# Altium PCB PCB1.PcbDoc
Units mm, origin at the board's own origin, x right, y up, seen from the top; angles counter-clockwise.
Board outline 94.87 x 57.28 mm, 4 copper layers (Top Layer, Int1 (GND), Int2 (PWR), Bottom Layer), stack 1.369 mm thick; 62 components, 43 nets, 200 pads, 42 vias.
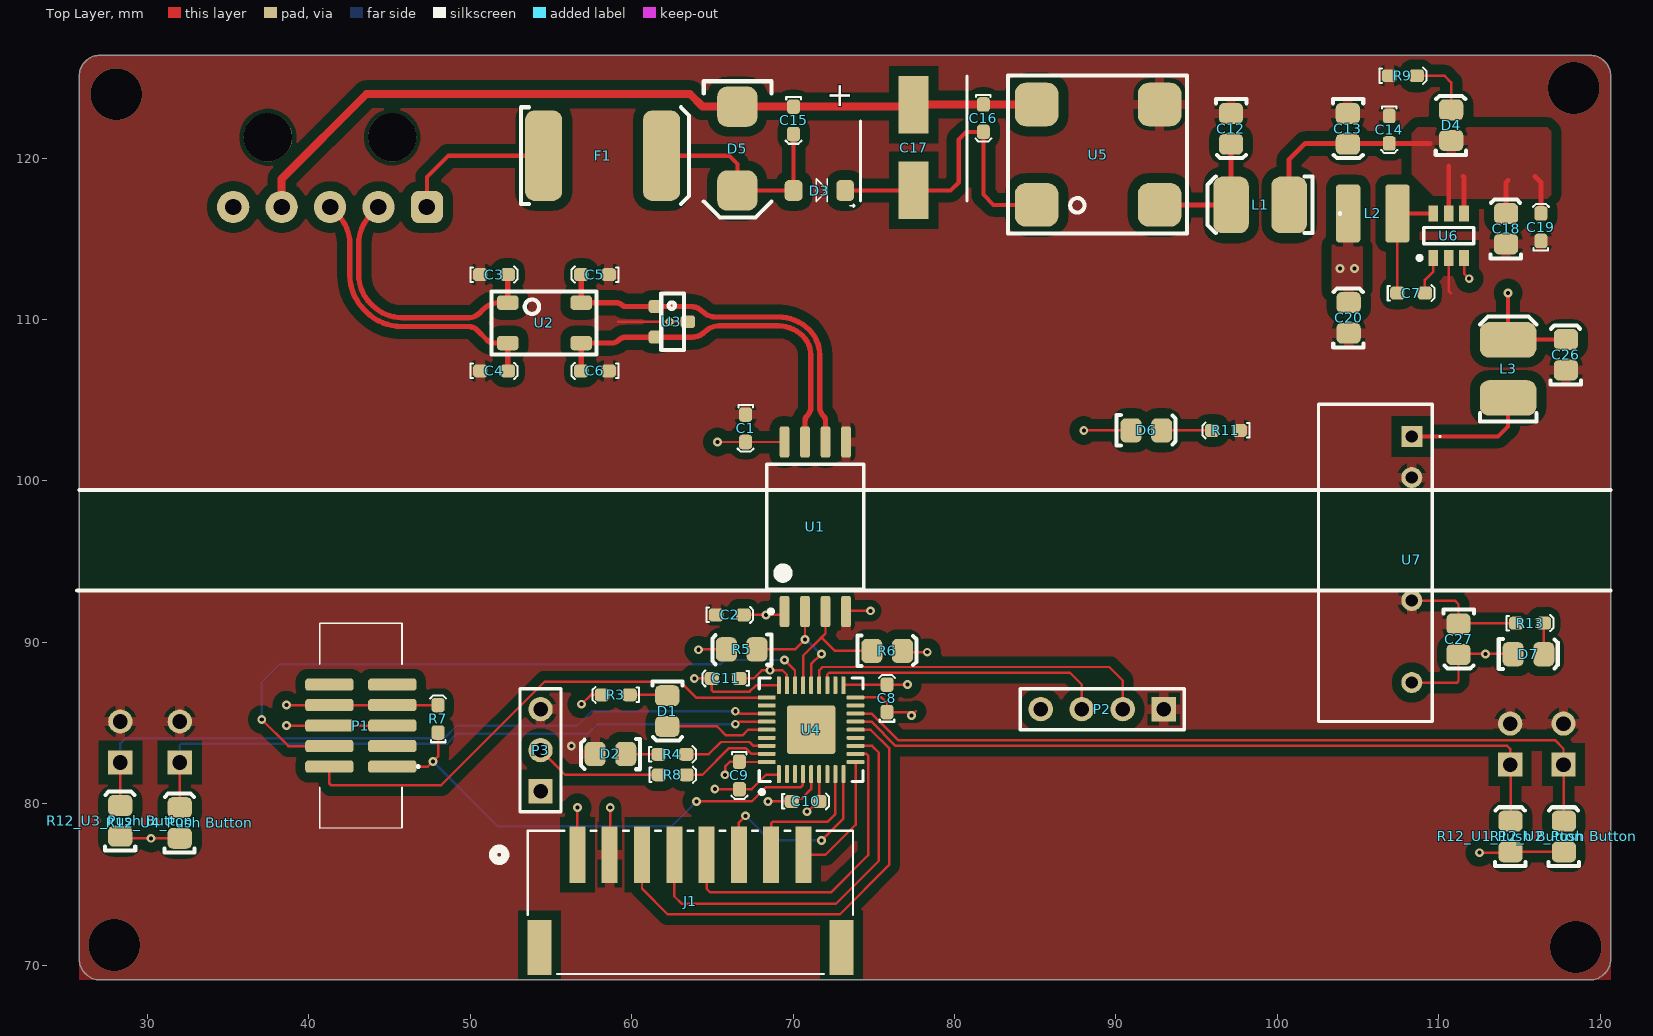
[diagram p0: Top Layer view]
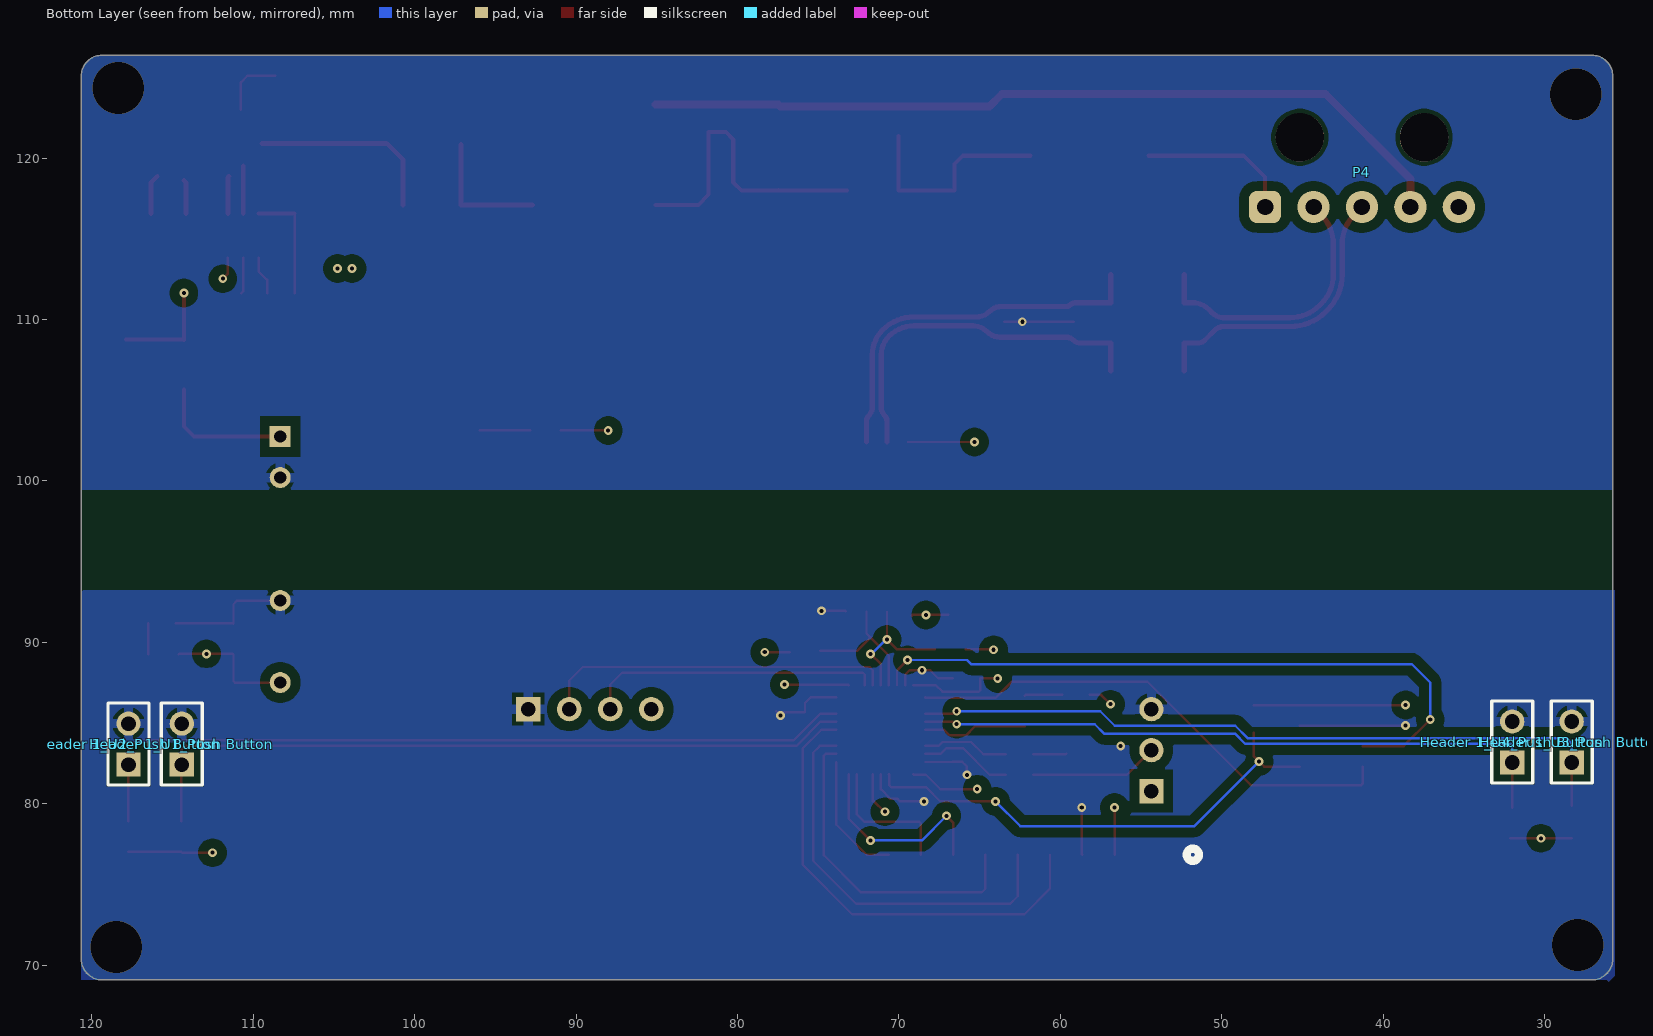
[diagram p1: Bottom Layer view, seen from below]
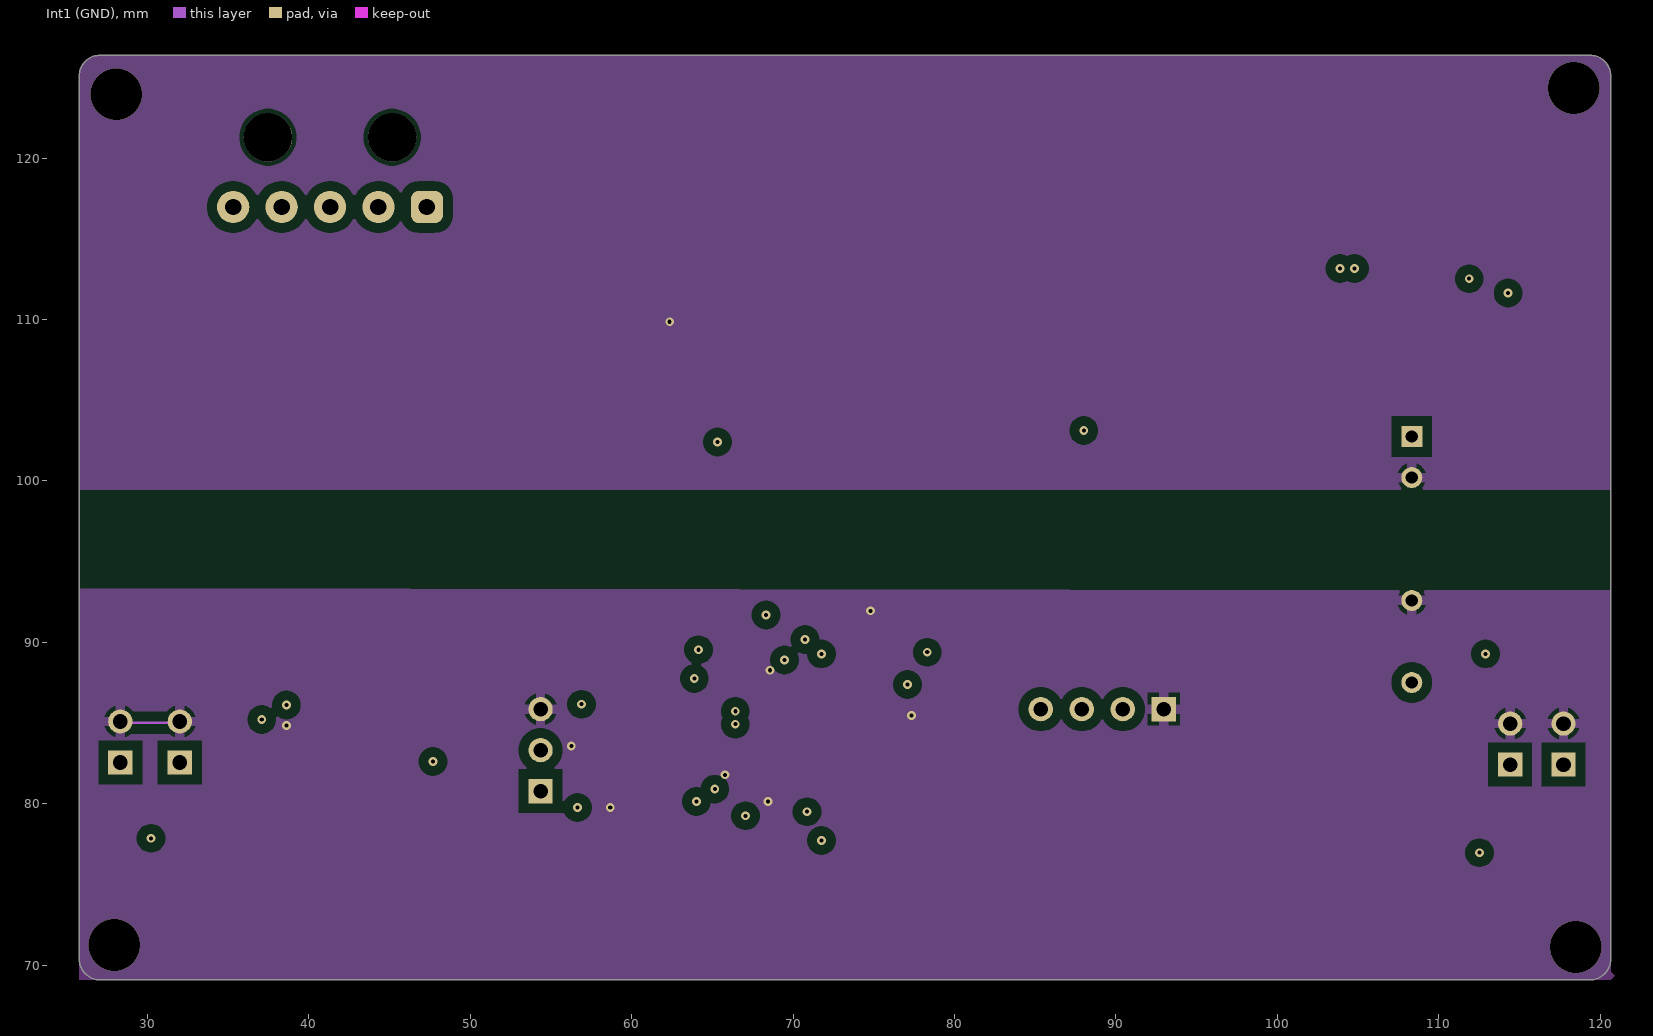
[diagram p2: Int1 (GND)]
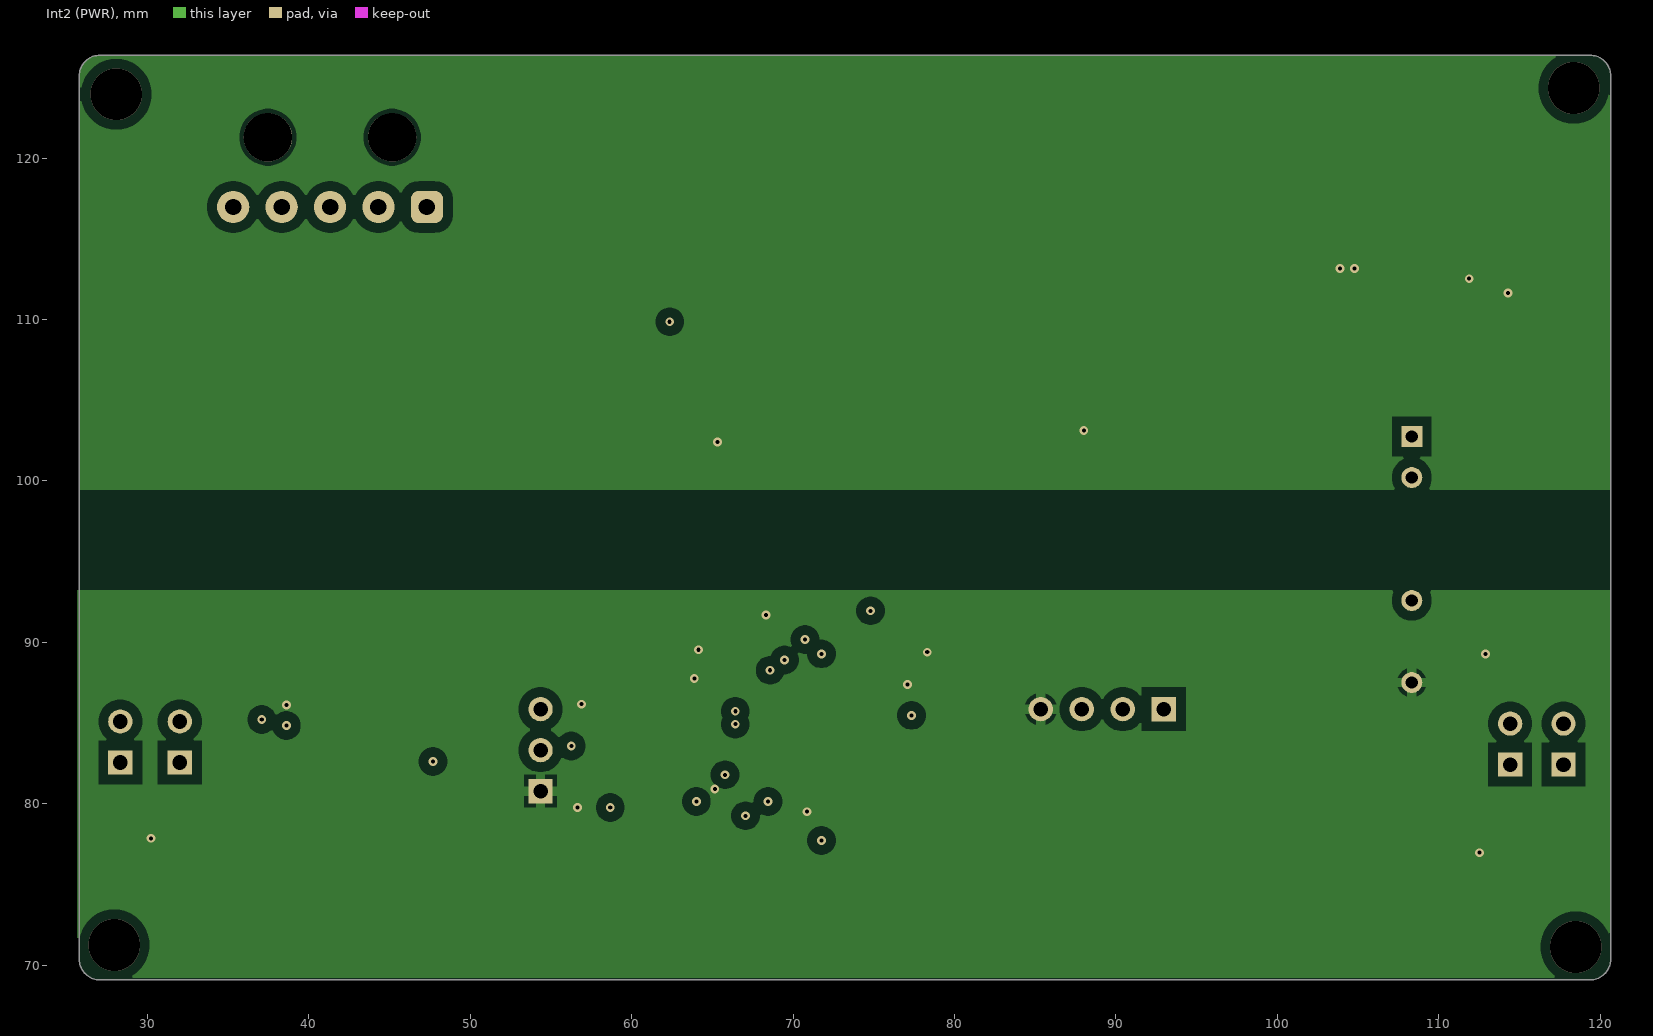
[diagram p3: Int2 (PWR)]
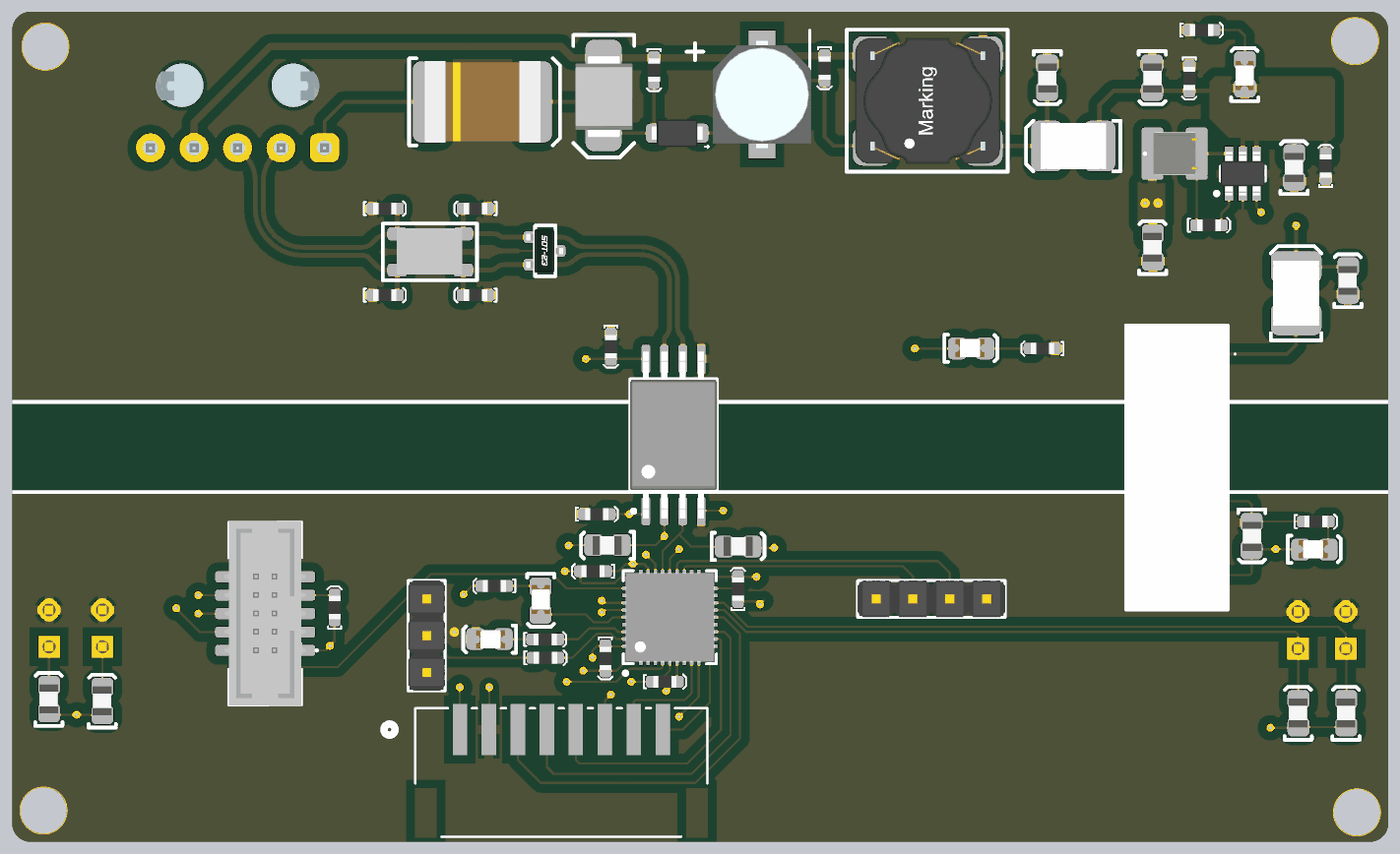
[diagram p4: 3D render of the assembled board from above, using the file's embedded part models]
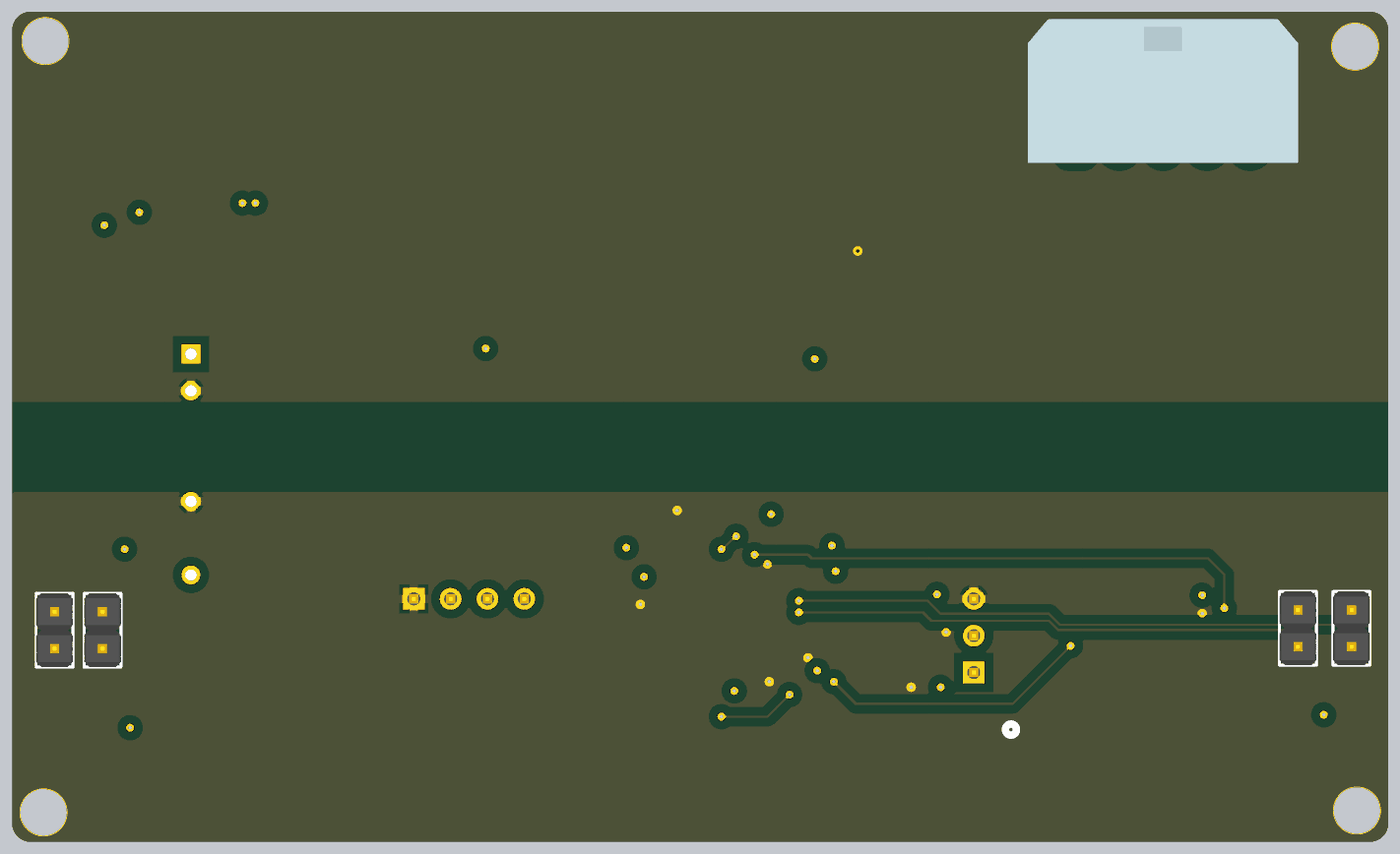
[diagram p5: 3D render of the assembled board from below, using the file's embedded part models]

## Layer stack, top to bottom
Top Solder: solder mask 0.0254, SM-001, Dk 4
Top Layer: signal copper 0.035
Dielectric 1: prepreg 0.1295, PP-017, Dk 4.3
Dielectric 2: prepreg 0.1295, PP-017, Dk 4.3
Int1 (GND): signal copper 0.035
Dielectric 3: core 0.7112, Core-039, Dk 4.8
Int2 (PWR): signal copper 0.035
Dielectric 4: prepreg 0.1295, PP-017, Dk 4.3
Dielectric 5: prepreg 0.1295, PP-017, Dk 4.3
Bottom Layer: signal copper 0.035
Bottom Solder: solder mask 0.0254, SM-001, Dk 4

## Board outline
27.051,69.088 cw(c27.051,70.358) 25.781,70.358 25.781,125.095 cw(c27.051,125.095) 27.051,126.365 119.38,126.365 cw(c119.38,125.095) 120.65,125.095 120.65,70.358 cw(c119.38,70.358) 119.38,69.088

## Design rules (kind name [scope] priority, off if disabled: settings)
Clearance Clearance_1 [(ExistsOnLayer('Int1 (GND)') Or ExistsOnLayer('Int2 (PWR)')) vs (ExistsOnLayer('Int1 (GND)') Or ExistsOnLayer('Int2 (PWR)'))] p1: gap=0.254 ignorepadtopadclearanceinfootprint=FALSE except(0: Arc-Hole Track-Hole SMDPad-Hole THPad-Hole Via-Hole Fill-Hole Region-Hole Text-Hole; 0.1: THPad-THPad; 0.152: Arc-SMDPad Track-SMDPad SMDPad-SMDPad; 0.2: Arc-THPad Track-THPad SMDPad-THPad THPad-Via; 0.203: Arc-Arc Arc-Track Arc-Region Track-Track Track-Region SMDPad-Region THPad-Region Via-Region Fill-Region Poly-Region Region-Region; 0.6: Arc-Poly Track-Poly SMDPad-Poly THPad-Poly Via-Poly Fill-Poly Poly-Poly) sourcerule=36 cellrowname=All cellrowtype=0 cellcolname=All cellcoltype=0 innerlayers=TRUE
Clearance Clearance_2 [(ExistsOnLayer('Top Layer') Or ExistsOnLayer('Bottom Layer')) vs (ExistsOnLayer('Top Layer') Or ExistsOnLayer('Bottom Layer'))] p2: gap=0.254 ignorepadtopadclearanceinfootprint=FALSE except(0: Arc-Hole Track-Hole SMDPad-Hole THPad-Hole Via-Hole Fill-Hole Region-Hole Text-Hole; 0.1: THPad-THPad; 0.152: Arc-SMDPad Track-SMDPad SMDPad-SMDPad; 0.2: Arc-THPad Track-THPad SMDPad-THPad THPad-Via; 0.203: Arc-Arc Arc-Track Arc-Region Track-Track Track-Region SMDPad-Region THPad-Region Via-Region Fill-Region Poly-Region Region-Region; 0.6: Arc-Poly Track-Poly SMDPad-Poly THPad-Poly Via-Poly Fill-Poly Poly-Poly) sourcerule=36 cellrowname=All cellrowtype=0 cellcolname=All cellcoltype=0 outerlayers=TRUE
Clearance [All] p3: gap=0.254 ignorepadtopadclearanceinfootprint=FALSE except(0: Arc-Hole Track-Hole SMDPad-Hole THPad-Hole Via-Hole Fill-Hole Region-Hole Text-Hole; 0.1: THPad-THPad; 0.152: Arc-SMDPad Track-SMDPad SMDPad-SMDPad; 0.2: Arc-THPad Track-THPad SMDPad-THPad THPad-Via; 0.203: Arc-Arc Arc-Track Arc-Region Track-Track Track-Region SMDPad-Region THPad-Region Via-Region Fill-Region Poly-Region Region-Region; 0.6: Arc-Poly Track-Poly SMDPad-Poly THPad-Poly Via-Poly Fill-Poly Poly-Poly) ismatrix=TRUE
DiffPairsRouting [All] p1: maxlimit=0.22 minlimit=0.22 mostfreqgap=0.22 toplayer_minwidth=0.33 toplayer_maxwidth=0.33 toplayer_prefwidth=0.33 midlayer1_minwidth=0.33 midlayer1_maxwidth=0.33 midlayer1_prefwidth=0.33 midlayer2_minwidth=0.33 midlayer2_maxwidth=0.33 midlayer2_prefwidth=0.33 bottomlayer_minwidth=0.33 bottomlayer_maxwidth=0.33 bottomlayer_prefwidth=0.33 maxuncoupledlength=12.7
Height [All] p1: minheight=0 maxheight=50 prefheight=12.7
HoleSize [All] p1: absolutevalues=TRUE maxlimit=10 minlimit=0.025 maxpercent=80.000 minpercent=20.000
MinimumSolderMaskSliver [All] p1 off: minsoldermaskwidth=0.254
NetAntennae [All] p1 off: netantennaetolerance=0
PlaneClearance [All] p1: clearance=0.4
PlaneConnect [All] p1: pad.planeconnectstyle=Relief pad.reliefexpansion=0.508 pad.reliefentries=4 pad.reliefconductorwidth=0.8 pad.reliefairgap=0.254 via.planeconnectstyle=Direct via.reliefexpansion=0.508 via.reliefentries=4 via.reliefconductorwidth=0.8 via.reliefairgap=0.254
PolygonConnect [All] p1: thpad.connectstyle=Relief thpad.reliefconductorwidth=0.6 thpad.reliefentries=4 thpad.polygonreliefangle="90 Angle" thpad.airgapwidth=0.254 smdpad.connectstyle=Relief smdpad.reliefconductorwidth=0.6 smdpad.reliefentries=4 smdpad.polygonreliefangle="90 Angle" smdpad.airgapwidth=0.254 via.connectstyle=Direct via.reliefconductorwidth=0.6 via.reliefentries=4 via.polygonreliefangle="90 Angle" via.airgapwidth=0.254
RoutingVias [All] p1: holewidth=0.25 width=0.55 viastyle="Through Hole" minholewidth=0.203 minwidth=0.254 maxholewidth=0.711 maxwidth=1.27
SilkToSilkClearance [All] p1 off: silktosilkclearance=0.254
SilkToSolderMaskClearance [IsPad] p1 off: minsilkscreentomaskgap=0.254 clearancetoexposedcopper=TRUE
SolderMaskExpansion [All] p1: expansion=0.051 istentingtop=FALSE
Width [All] p1: maxlimit=3 minlimit=0.127 preferedwidth=0.152 minimp=50.000000 maximp=50.000000 favimp=50.000000
21 further rules are at their usual default settings.

## Classes and differential pairs
component class TopLevel: P4
channel class "Push Button": "U1_Push Button" "U2_Push Button" "U3_Push Button" "U4_Push Button"
component class U_Microcontroller: C8 C9 C10 C11 D1 D2 P1 P2 P3 R3 R4 R5 R6 R7 R8 U4
component class "U_Driver Board Port": J1
component class "U4_Push Button": "Header 1_U4_Push Button" "R12_U4_Push Button" "S1_U4_Push Button"
component class "U3_Push Button": "Header 1_U3_Push Button" "R12_U3_Push Button" "S1_U3_Push Button"
component class "U2_Push Button": "Header 1_U2_Push Button" "R12_U2_Push Button" "S1_U2_Push Button"
component class "U1_Push Button": "Header 1_U1_Push Button" "R12_U1_Push Button" "S1_U1_Push Button"
component class "Power Supply": C7 C12 C13 C14 C15 C16 C17 C18 C19 C20 C26 C27 D3 D4 D5 D6 D7 F1 L1 L2 L3 R9 R11 R13 U5 U6 U7
component class CAN: C1 C2 C3 C4 C5 C6 U1 U2 U3
differential pair D_CAN1: +CAN1_P -CAN1_N
differential pair D_CAN: +CAN_P -CAN_N

## Components (designator, comment, footprint, x,y, rotation, side; value= is the part's Value field where it differs from the comment)
C1 "100nF" 0603 67.056,104.105 r270 top
C2 "100nF" 0603 65.229,91.694 r0 top
C3 "100pF" 0603 50.624,112.776 r0 top
C4 "100pF" 0603 50.624,106.807 r0 top
C5 "100pF" 0603 58.574,112.776 r180 top
C6 "100pF" 0603 58.574,106.807 r180 top
C7 "100nF" 0603 107.442,111.633 r0 top
C8 "100nF" 0603 75.819,85.676 r90 top
C9 "100nF" 0603 66.675,82.599 r270 top
C10 "100nF" 0603 69.928,80.137 r0 top
C11 "100nF" 0603 66.675,87.757 r180 top
C12 "10uF" 0805 97.155,121.793 r270 top
C13 "10uF" 0805 104.394,121.793 r270 top
C14 "100nF" 0603 106.934,122.604 r270 top
C15 "100nF" 0603 70.028,123.183 r270 top
C16 "100nF" 0603 81.788,123.317 r270 top
C17 "47uF" "CHEMI-CON ELCO" 77.47,120.65 r270 top
C18 "2.2uF" 0805 114.147,115.626 r90 top
C19 "100nF" 0603 116.332,114.864 r90 top
C20 "10uF" 0805 104.394,110.109 r90 top
C26 "10uF" 0805 117.856,107.823 r90 top
C27 "10uF" 0805 111.252,90.17 r270 top
D1 "Yellow" "0805 LED" 62.23,85.725 r270 top
D2 "Yellow" "0805 LED" 58.674,83.058 r180 top
D3 "PMEG100T10ELR-QX" "NXP SOD123W" 71.628,117.983 r180 top
D4 "Red" "0805 LED" 110.744,122.047 r90 top
D5 "SM6T36CAY" "ST SMB DIODE" 66.548,120.583 r90 top
D6 "Red" "0805 LED" 91.899,103.15 r0 top
D7 "Red" "0805 LED" 115.57,89.281 r0 top
F1 "0ZCF0100AF2A" 2920 54.549,120.142 r0 top
"Header 1_U1_Push Button" "2.54mm" "TH 2.54mm Header 1x2" 114.427,82.423 r90 bottom (schematic designator "Header 1")
"Header 1_U2_Push Button" "2.54mm" "TH 2.54mm Header 1x2" 117.729,82.423 r90 bottom (schematic designator "Header 1")
"Header 1_U3_Push Button" "2.54mm" "TH 2.54mm Header 1x2" 28.321,82.55 r90 bottom (schematic designator "Header 1")
"Header 1_U4_Push Button" "2.54mm" "TH 2.54mm Header 1x2" 32.004,82.55 r90 bottom (schematic designator "Header 1")
J1 "S8B-PH-SM4-TB" CONN_S8B-PH-SM4-TB_JST 63.642,73.88 r0 top
L1 "12uH" 1812 98.933,117.094 r180 top
L2 "4.7uH" SRN3015TA-4R7M 105.918,116.564 r0 top
L3 "12uH" 1812 114.3,106.934 r90 top
P1 "1.27mm" 3221-10-0300-00 43.225,84.836 r90 top
P2 "2.54mm" "TH 2.54mm Header 1x4" 92.964,85.852 r180 top
P3 "2.54mm" "TH 2.54mm Header 1x3" 54.356,80.772 r90 top
P4 "436500500" 436500500 47.315,116.965 r0 bottom
R3 "500R" 0603 59.866,86.741 r180 top
R4 "500R" 0603 61.673,83.058 r0 top
R5 "5.1k" 0805 66.802,89.535 r180 top
R6 "5.1k" 0805 75.84,89.487 r0 top
R7 "10k" 0603 48.006,84.406 r90 top
R8 "10k" 0603 61.692,81.788 r0 top
R9 "20K" 0603 106.934,125.095 r0 top
R11 "2K" 0603 97.663,103.124 r180 top
"R12_U1_Push Button" "1k" 0805 114.427,77.978 r90 top (schematic designator R12)
"R12_U2_Push Button" "1k" 0805 117.729,77.978 r90 top (schematic designator R12)
"R12_U3_Push Button" "1k" 0805 28.295,78.945 r90 top (schematic designator R12)
"R12_U4_Push Button" "1k" 0805 31.978,78.818 r90 top (schematic designator R12)
R13 "1k" 0603 114.808,91.186 r0 top
U1 "ISO1042" TI-SOIC-8 71.374,97.155 r90 top
U2 "B82787C0104H002" "TDK 4-PC Pad" 52.324,111.035 r0 top value="100µH @ 100kHz"
U3 "NUP2105L" "ON SOT-23" 62.484,109.855 r270 top
U4 "STM32F103T8U6" STM_QFN-36 71.12,84.582 r90 top
U5 "744272121" "Wurth 4-PC Pad" 92.71,123.317 r180 top value="120uH @ 100kHz"
U6 "LMR50410Y5FQDBVRQ1" TI-SOT23-6 110.617,115.189 r90 top
U7 "RK-053.3S/H6" RK-053.3S/H6 108.331,102.743 r270 top

## Footprints (in the part's own frame and the unit in brackets; to place one, negate y for a bottom-side part, rotate by r counter-clockwise, add the part's x,y. Pads: shape width x height; smd on the part's side, far side on the other; paste and mask are expansions set on the pad)
0603 [mm]
  rrect50% 0.9x0.8 smd: 1(0,0) 2(1.7,0)
  silkscreen extent -0.6,-0.5 2.3,0.5, body extent 0.05,-0.42 1.65,0.43, height 0.6
0805 [mm]
  rrect50% 1.3x1.5 smd: 1(-0.962,-0.026) 2(0.938,-0.026)
  silkscreen extent -1.85,-0.95 1.8,0.93, body extent -1,-0.65 1,0.66, height 0.73
"0805 LED" [mm]
  rrect50% 1.3x1.5 smd: A(-0.962,-0.026) K(0.938,-0.026)
  silkscreen extent -1.85,-0.95 1.8,0.93, body extent -1.09,-0.63 0.91,0.62, height 1
1812 [mm]
  rrect50% 2.2x3.5 smd: 1(-1.8,0) 2(1.8,0)
  silkscreen extent -3.25,-1.75 3.25,1.75, body extent -2.25,-1.6 2.25,1.6, height 2.5
2920 [mm]
  rrect50% 2.3x5.6 smd: 1(0,0) 2(7.3,0)
  silkscreen extent -1.4,-3 9,3, body extent -0.34,-2.81 7.64,2.81, height 1.14
3221-10-0300-00 [mm]
  rrect50% 0.76x3 smd: 1(-2.54,-1.95) 2(-2.54,1.95) 3(-1.27,-1.95) 4(-1.27,1.95) 5(0,-1.95) 6(0,1.95) 7(1.27,-1.95) 8(1.27,1.95) 9(2.54,-1.95) 10(2.54,1.95)
  silkscreen extent -6.35,-3.6 6.35,2.55, body extent -6.34,-2.8 6.36,2.8, height 5.25
436500500 [mm]
  rrect50% 2x2 hole 1.02 paste-2539.97: 1(0,0)
  round 2 hole 1.02 paste-2539.97: 2(-3,0) 3(-6,0) 4(-9,0) 5(-12,0)
  round 3 hole 3 unplated: PEG(-9.85,-4.32) PEG(-2.15,-4.32)
  body extent -15.32,-8.88 3.32,1.02, height 5.06
"CHEMI-CON ELCO" [mm]
  rect 3.55x1.85 smd: 1(-2.65,0) 2(2.65,0)
  silkscreen extent -4.43,-3.3 3.3,3.3, body extent -3.7,-3.4 3.7,3.4, height 6.1
CONN_S8B-PH-SM4-TB_JST [mil]
  rect 39x138 smd paste+0 mask+0: 1(-275.59,116.35) 2(-196.85,116.35) 3(-118.11,116.35) 4(-39.37,116.35) 5(39.37,116.35) 6(118.11,116.35) 7(196.85,116.35) 8(275.59,116.35)
  rect 59x134 smd paste-67 mask-67: 9(-368.11,-110.03) 10(368.11,-110.03)
  silkscreen extent -481,-174 396,174
"NXP SOD123W" [mm]
  rrect50% 1.1x1.3 smd: A(1.6,0) K(-1.6,0)
  silkscreen extent -2.2,-0.73 0.2,1.04, body extent -1.75,-0.95 1.75,0.95, height 1.1
"ON SOT-23" [mm] "NUP2105L"
  rrect50% 0.8x0.9 smd: 1(-0.95,-1) 2(0.95,-1) 3(0,1)
  silkscreen extent -1.75,-0.65 1.75,0.75, body extent -1.5,-1.27 1.5,1.28, height 1
RK-053.3S/H6 [mm]
  rect 1.303x1.303 hole 0.76: 1(0,0)
  round 1.303 hole 0.76: 2(2.54,0) 5(10.16,0) 7(15.24,0)
  silkscreen extent -2,-5.78 17.65,1.8, body extent -1.99,-5.78 17.65,1.26, height 10.2
SRN3015TA-4R7M [mm]
  rrect25% 1.5x3.6 smd: 1(-1.525,0) 2(1.525,0)
  silkscreen extent -2.1,-0.05 -2,0.05, body extent -1.46,-1.47 1.61,1.47, height 1.4
"ST SMB DIODE" [mm]
  rrect50% 2.5x2.5 smd: A(2.6,0) K(-2.6,0)
  silkscreen extent -4.28,-2.12 4.17,2.08, body extent -2.88,-1.99 2.71,1.95, height 2.5
STM_QFN-36 [mm]
  rrect50% 1.1x0.25 smd: 1(-2.75,2) 2(-2.75,1.5) 3(-2.75,1) 4(-2.75,0.5) 5(-2.75,0) 6(-2.75,-0.5) 7(-2.75,-1) 8(-2.75,-1.5) 9(-2.75,-2) 19(2.75,-2) 20(2.75,-1.5) 21(2.75,-1) 22(2.75,-0.5) 23(2.75,0) 24(2.75,0.5) 25(2.75,1) 26(2.75,1.5) 27(2.75,2)
  rrect50% 0.25x1.1 smd: 10(-2,-2.75) 11(-1.5,-2.75) 12(-1,-2.75) 13(-0.5,-2.75) 14(0,-2.75) 15(0.5,-2.75) 16(1,-2.75) 17(1.5,-2.75) 18(2,-2.75) 28(2,2.75) 29(1.5,2.75) 30(1,2.75) 31(0.5,2.75) 32(0,2.75) 33(-0.5,2.75) 34(-1,2.75) 35(-1.5,2.75) 36(-2,2.75)
  rrect10% 3x3 smd: 37(0,0)
  silkscreen extent -3.98,-3.21 3.21,3.21, body extent -3.08,-3.08 3.08,3.08, height 1
"TDK 4-PC Pad" [mm]
  rrect50% 1.35x0.9 smd: 1(0,-2.5) 2(0,0) 3(4.55,0) 4(4.55,-2.5)
  silkscreen extent -1,-3.2 5.5,0.7, body extent -0.02,-2.82 4.48,0.38, height 2.8
"TH 2.54mm Header 1x2" [mm]
  rect 1.5x1.5 hole 0.9: 1(0,0)
  round 1.5 hole 0.9: 2(2.54,0)
  silkscreen extent -1.27,-1.27 3.81,1.27, body extent -1.27,-1.27 3.81,1.27, height 9.5
"TH 2.54mm Header 1x3" [mm]
  rect 1.5x1.5 hole 0.9: 1(0,0)
  round 1.5 hole 0.9: 2(2.54,0) 3(5.08,0)
  silkscreen extent -1.27,-1.27 6.35,1.27, body extent -1.27,-1.27 6.35,1.27, height 9.5
"TH 2.54mm Header 1x4" [mm]
  rect 1.5x1.5 hole 0.9: 1(0,0)
  round 1.5 hole 0.9: 2(2.54,0) 3(5.08,0) 4(7.62,0)
  silkscreen extent -1.27,-1.27 8.89,1.27, body extent -1.27,-1.27 8.89,1.27, height 9.5
TI-SOIC-8 [mm]
  rrect50% 1.95x0.6 smd: 1(-5.25,1.905) 2(-5.25,0.635) 3(-5.25,-0.635) 4(-5.25,-1.905) 5(5.25,-1.905) 6(5.25,-0.635) 7(5.25,0.635) 8(5.25,1.905)
  silkscreen extent -5.37,-3 3.88,3, body extent -5.75,-3 5.75,3, height 2.8
TI-SOT23-6 [mm]
  rect 1x0.6 smd: 1(-1.375,0.95) 2(-1.375,0) 3(-1.375,-0.95) 4(1.375,-0.95) 5(1.375,0) 6(1.375,0.95)
  silkscreen extent -1.5,-1.55 0.5,1.92, body extent -1.5,-1.53 1.5,1.53, height 1.45
"Wurth 4-PC Pad" [mm]
  rrect50% 2.7x2.7 smd: 1(7.62,6.22) 2(0,6.22) 3(0,0) 4(7.62,0)
  silkscreen extent -1.7,-1.8 9.4,8, body extent -1.19,-1.24 8.81,7.46, height 6.2

## Part data
C1 C2 C7 C8 C9 C10 C11 C14 C15 C16 C19: library part GCM188L81H104KA57D, Digikey Part Number=490-6049-1-ND, Manufacturer=muRata, Rated Voltage=50V, Temperature Rating=X8L, Tolerance=±10%, Material=MLCC, Part Number=GCM188L81H104KA57D
C3 C4 C5 C6: library part GRM1885C1H101JA01D, Digikey Part Number=490-1427-1-ND, Manufacturer="Murata Electronics", Rated Voltage=50V, Temperature Rating="C0G, NP0", Tolerance=±5%, Material=MLCC, Part Number=GRM1885C1H101JA01D
C12 C13 C20 C26 C27: library part GRM21BR6YA106KE43L, Digikey Part Number=490-10514-6-ND, Manufacturer=muRata, Rated Voltage=50V, Temperature Rating=X5R, Tolerance=10%, Material=MLCC, Part Number=GRM21BR6YA106KE43L
C17: library part HHXA350ARA470MF61G, Part Number=HHXA350ARA470MF61G
C18: library part GRM21BR71E225KE11L, Digikey Part Number=490-14467-2-ND, Manufacturer="Murata Electronics", Rated Voltage=25V, Temperature Rating=X7R, Tolerance=±10%, Material=MLCC, Part Number=GRM21BR71E225KE11L
D1 D2: library part SML-211YTT86, "Yellow LED Indication - Discrete 1.75V 0805 (2012 Metric)", Digikey Part Number=511-1293-1-ND, Manufacturer="ROHM Semiconductor", Colour=Yellow, Part Number=SML-211YTT86
D3: Breakdown Voltage="100 V", Digikey Part Number=1727-PMEG100T10ELR-QXCT-ND, Forward Voltage="0.75 V @ 1A", Manufacturer="Nexperia USA Inc.", Rated Power="680 mW", Part Number=PMEG100T10ELR-QX
D4 D6 D7: library part SML-210LTT86, "Red LED Indication - Discrete 1.75V 0805 (2012 Metric)", Digikey Part Number=511-1286-1-ND, Manufacturer="ROHM Semiconductor", Colour=Red, Part Number=SML-210LTT86
D5: Breakdown Voltage="30.8 V", Digikey Part Number=497-10804-1-ND, Manufacturer=STMicroelectronics, Rated Power=600W, Forward Voltage="30.8 V", Part Number=SM6T36CAY
F1: "PTC RESET FUSE 60V 1A 292", Digikey Part Number=507-2070-1-ND, Manufacturer="Littelfuse Inc.", Digikey Link=https://www.digikey.com/product-detail/en/bel-fuse-inc/0ZCF0100AF2A/507-2070-1-ND/6210547, Part Number=0ZCF0100AF2A
"Header 1_U1_Push Button" "Header 1_U2_Push Button" "Header 1_U3_Push Button" "Header 1_U4_Push Button": library part "TH 2.54mm Header 1x2", Angle=0, Contact=NA, Flange=No, Part Number="TH 2.54mm Header 1x2", Pitch=2.54mm, Positions=2, Row Spacing=2.54mm
J1: "No Description Available", Mfr_Name=JST, RefDes=RefDes, Type=Type
L1: library part RLS-126, Digikey Part Number=945-3429-ND, Manufacturer=Recom, Rated Current=800mA, Tolerance=0.2, Impedence=230mOhm, Material=Wirewound, Part Number=RLS-126
L2: library part SRN4018-4R7M, Digikey Part Number=SRN3015TA-4R7MCT-ND, Manufacturer=Bourns, Rated Current=1.9A, Tolerance=0.2, Impedance=84mOhms, Material=Wirewound, Part Number=SRN4018-4R7M
L3: library part RLS-126, Digikey Part Number=945-3429-ND, Manufacturer=Recom, Rated Current="0.8 A", Tolerance=0.2, Impedance=230mOhm, Material=Wirewound, Part Number=RLS-126
P1: library part "SMD 1.27mm Header 2x5 (3221-10-0300-00)", Angle=0, Contact=NA, Flange=No, Part Number="SMD 1.27mm Header 2x5 (3221-10-0300-00)", Pitch=1.27mm, Positions=10, Row Spacing=1.27mm
P2: library part "TH 2.54mm Header 1x4", Angle=0, Contact=NA, Flange=No, Part Number="TH 2.54mm Header 1x4", Pitch=2.54mm, Positions=4, Row Spacing=2.54mm
P3: library part "TH 2.54mm Header 1x3", Angle=0, Contact=NA, Flange=No, Part Number="TH 2.54mm Header 1x3", Pitch=2.54mm, Positions=3, Row Spacing=2.54mm
P4: "Micro-Fit 5x1", Digikey Part Number=WM1863-ND, Angle=90, Contact=Tin, Digikey Link=https://www.digikey.com.au/en/products/detail/molex/0436500500/268992, Flange=No, Part Number=436500500, Pitch=3.0mm, Positions=5, Row Spacing=3.0mm
R3 R4: library part RT0603BRD07500RL, Digikey Part Number=13-RT0603BRD07500RL-ND, Manufacturer=YAGEO, Rated Power=0.1W, Tolerance=0.01, Material=FR-07, Part Number=RT0603BRD07500RL
R5 R6: library part RC0805FR075K1L, Digikey Part Number=311-5.10KCRCT-ND, Manufacturer=YAGEO, Rated Power=0.125W, Tolerance=0.01, Material=FR-07, Part Number=RC0805FR075K1L
R7 R8: library part RC0603FR-0710KL, Digikey Part Number=311-10.0KHRCT-ND, Manufacturer=YAGEO, Rated Power=0.1W, Tolerance=0.01, Material=FR-07, Part Number=RC0603FR-0710KL
R9: library part RC0603FR-0720KL, Digikey Part Number=311-20.0KHRCT-ND, Manufacturer=YAGEO, Rated Power=0.1W, Tolerance=0.01, Material=FR-07, Part Number=RC0603FR-0720KL
R11: library part RC0603FR-072KL, Digikey Part Number=311-2.00KHRCT-ND, Manufacturer=YAGEO, Rated Power=0.1W, Tolerance=0.01, Material=FR-07, Part Number=RC0603FR-072KL
"R12_U1_Push Button" "R12_U2_Push Button" "R12_U3_Push Button" "R12_U4_Push Button": library part RC0805FR071KL, Digikey Part Number=311-1.00KCRCT-ND, Manufacturer=YAGEO, Rated Voltage=0.125W, Tolerance=0.01, Material=FR-07, Part Number=RC0805FR071KL
R13: library part RC0603FR-071KL, Digikey Part Number=311-1.00KHRCT-ND, Manufacturer=YAGEO, Rated Power=0.1W, Tolerance=0.01, Material=FR-07, Part Number=RC0603FR-071KL
U1: "IC CAN TRANSCEIVER 1/1 8SOIC", Digikey Part Number=296-ISO1042BQDWVQ1-ND, Manufacturer="Texas Instruments", Part Number=ISO1042
U2: Digikey Part Number=495-4598-1-ND, Manufacturer="EPCOS (TDK)", Rated Current=150mA, Impedance="5.8 kOhms @ 10MHz", Material=Wirewound, Part Number=B82787C0104H002
U3: "Dual Line CAN Bus Protector", Digikey Part Number=NUP2105LT1GOSCT-ND, Manufacturer="ON Semiconductor", Digikey Link=https://www.digikey.com/product-detail/en/on-semiconductor/NUP2105LT1G/NUP2105LT1GOSCT-ND/1485001, Part Number=NUP2105L
U4: "ARM® Cortex®-M3 STM32F1 Microcontroller IC 32-Bit 72MHz 64KB (64K x 8) FLASH QFN", Manufacturer="ST Microelectronics", Digikey Link=https://www.digikey.com/en/products/detail/stmicroelectronics/stm32f103t8u6/1852493, Digikey Part Number=STM32F103T8U6, Part Number=STM32F103T8U6
U5: Digikey Part Number=732-1489-1-ND, Manufacturer="Wurth Electronics Inc", Rated Current="2.5 A", Impedance="460 Ohms @ 30MHz", Material=Wirewound, Part Number=744272121
U6: library part LMR50410-Q1, "IC REG BUCK 5V 1A SOT23-6", Digikey Part Number=296-LMR50410Y5FQDBVRQ1CT-ND, Input Voltage=4-36V, Manufacturer="Texas Instruments", Output Current=1A, Output Voltage=5V, Part Number=LMR50410-Q1
U7: "DC DC CONVERTER 3.3V 1W", Input Voltage=5V, Manufacturer=Recom, Output Current=303mA, Output Voltage=3.3V, Part Number=RK-053.3S/H6

## Via types
v1: diameter 0.55, hole 0.25, Top Layer to Bottom Layer, 38 vias
v2: diameter 3.2, hole 3.2, Top Layer to Bottom Layer, 4 vias

## Nets (pads, with @x,y where several pads share a name; then routed paths per layer and width w, separated by ;. In a path a pad name is that pad's centre, name@x,y a point inside that pad or via, vN(x,y) a via of type N, cw(c..) or ccw(c..) an arc to the next point about the centre after c; other vN are vias at no path point)
0V: C1.1 C3.1 C4.1 C5.1 C6.1 C12.1 C13.1 C14.1 C18.1 C19.1 C20.1 C26.1 R9.1 R11.1 U1.5 U3.3 U5.3 U6.2 U7.2 | length 6.5
  Top Layer w0.152: 59.182,109.855 U3.3 ; U6.2 110.617,111.76 110.744,111.633
  other v1: 62.357,109.855
  other v2: 28.067,123.952 118.364,124.333
0V_(ISO): "Header 1_U1_Push Button.2" "Header 1_U2_Push Button.2" "Header 1_U3_Push Button.2" "Header 1_U4_Push Button.2" C2.1 C8.1 C9.1 C10.1 C11.1 C27.1 D2.K J1.2 P1.5 P1.6 P2.1 P3.3 R13.1 U1.4 U4.5 U4.18 U4.26 U4.36 U7.5 | length 38.7
  Top Layer w0.152: 28.258,85.153 28.321,85.09 ; 32.004,85.09 32.067,85.026 ; v1(38.608,84.836) P1.6 P1.5 ; J1.2 58.674,76.867 v1(58.674,79.756) ; v1(65.786,81.788) 65.786,82.296 66.089,82.599 C9.1 66.692,82.582 U4.36 ; C11.1 67.564,87.757 68.072,88.265 v1(68.58,88.265) 69.342,88.265 69.619,87.988 U4.26 U4.26 ; v1(68.453,80.137) C10.1 70.087,80.296 70.517,80.296 71.12,80.899 U4.5 ; U1.4 73.322,91.948 v1(74.803,91.948) ; U4.18 75.47,86.582 75.819,86.233 C8.1 77.548,85.676 77.597,85.725 ; U7.5 110.998,92.583 111.226,92.355 C27.1 111.28,91.186 R13.1
  Int1 (GND) w0.152: 28.258,85.153 28.321,85.09 ; 28.321,85.026 32.067,85.026 32.004,85.09 31.877,85.09 ; U7.5 U7.5@108.458,92.583
  other v1: 56.261,83.566 77.343,85.471
  other v2: 118.491,71.12 27.94,71.247
3V3: "R12_U1_Push Button.1" "R12_U2_Push Button.1" "R12_U3_Push Button.1" "R12_U4_Push Button.1" C2.2 C8.2 C9.2 C10.2 C11.2 C27.2 D7.A J1.1 P1.7 P1.8 P2.4 P3.1 R3.2 R5.2 R6.2 R7.2 U1.1 U4.1 U4.6 U4.19 U4.27 U7.7 | length 53.7
  Top Layer w0.152: 28.321,77.856 32.131,77.856 32.126,77.851 ; v1(38.608,86.106) P1.8 P1.7 R7.2 ; J1.1 v1(56.642,79.756) ; v1(56.896,86.162) 57.475,86.741 R3.2 ; v1(63.881,87.757) C11.2 64.975,87.026 65.064,86.937 67.31,86.937 67.705,87.332 U4.27 ; v1@64.161,89.561 R5.2 ; v1(65.151,80.899) C9.2 67.437,80.899 68.326,81.788 69.076,81.788 U4.1 ; C2.2 69.172,91.694 U1.1@69.215,91.651 ; v1(70.866,79.502) 70.904,79.502 71.539,80.137 C10.2 71.62,80.145 U4.6 ; U4.19 73.164,87.376 C8.2 v1(77.089,87.376) ; R6.2@76.757,89.382 v1(78.312,89.382) ; U7.7 111.137,87.503 111.226,87.592 C27.2 111.275,89.281 v1(112.903,89.281) 114.582,89.281 D7.A ; v1(112.522,76.962) 114.399,76.962 114.453,77.016 117.755,77.016
  other v1: 30.226,77.856 64.135,89.535 68.326,91.694
5V: C1.2 C20.2 C26.2 D6.A L2.1 L3.2 U1.8 U6.3 | length 15
  Top Layer w0.152: v1(65.321,102.405) C1.2 U1.8 ; v1(88.011,103.124) D6.A ; U6.3 111.567,112.842 v1(111.887,112.522)
  Top Layer w0.254: v1(114.3,111.633) L3.2 114.327,108.761 C26.2
  other v1: 103.886,113.157 104.775,113.157
BOOT0: P3.2 R8.1 | length 8
  Top Layer w0.152: P3.2 55.245,82.423 55.88,81.788 R8.1
CAN1_N: C3.2 P4.2 U2.2 | length 17.4
  Top Layer w0.33: P4.2 43.834,116.484 ccw(c45.63,114.688) 43.09,114.688 43.09,112.748 ccw(c45.565,112.748) 43.815,110.998 43.96,110.853 ccw(c45.756,112.649) 45.756,110.109 49.911,110.109 ccw(c49.911,111.029) 50.561,110.378 50.8,110.617 cw(c51.81,109.607) 51.81,111.035 U2.2 C3.2
CAN1_P: C4.2 P4.3 U2.1 | length 18.3
  Top Layer w0.33: P4.3 41.796,116.484 cw(c40,114.688) 42.54,114.688 42.54,112.748 ccw(c45.565,112.748) 43.426,110.609 43.571,110.464 ccw(c45.756,112.649) 45.756,109.559 49.911,109.559 cw(c49.911,108.844) 50.416,109.35 51.054,108.712 ccw(c51.48,109.138) 51.48,108.535 U2.1 C4.2
CAN_N: C5.2 U1.6 U2.3 U3.1 | length 23.5
  Top Layer w0.33: C5.2 U2.3 59.039,111.035 cw(c59.039,110.474) 59.436,110.871 ccw(c59.595,111.03) 59.595,110.805 U3.1 63.629,110.805 cw(c63.629,109.73) 64.389,110.49 ccw(c65.207,111.308) 65.207,110.151 69.079,110.151 cw(c69.079,107.433) 71.001,109.355 cw(c69.436,107.79) 71.649,107.79 71.649,104.576 ccw(c72.445,104.576) 71.882,104.013 cw(c71.575,103.706) 72.009,103.706 U1.6
CAN_P: C6.2 U1.7 U2.4 U3.2 | length 22.7
  Top Layer w0.33: C6.2 U2.4 58.756,108.535 ccw(c58.756,109.138) 59.182,108.712 cw(c59.648,108.246) 59.648,108.905 U3.2 63.756,108.905 ccw(c63.756,109.98) 64.516,109.22 cw(c65.436,108.3) 65.436,109.601 69.079,109.601 cw(c69.079,107.433) 70.612,108.966 cw(c69.436,107.79) 71.099,107.79 71.099,104.576 cw(c70.303,104.576) 70.866,104.013 ccw(c71.173,103.706) 70.739,103.706 U1.7
CAN_TX_INDC: R4.2 U4.34 | length 5.4
  Top Layer w0.152: R4.2 64.77,83.058 65.532,83.82 67.31,83.82 67.548,83.582 U4.34
GLV+: F1.1 P4.1 | length 9.6
  Top Layer w0.254: P4.1 47.315,118.816 48.641,120.142 F1.1
GLV-: C15.1 C16.1 C17.1 D5.A P4.4 U5.4 | length 51.1
  Top Layer w0.5: P4.4 38.315,118.706 43.561,123.952 63.627,123.952 64.396,123.183 D5.A C15.1 77.353,123.183 C17.1 77.487,123.317 C16.1 U5.4
HB: D1.K U4.32 | length 6.5
  Top Layer w0.152: D1.K 65.299,84.787 65.855,84.231 66.858,84.231 67.209,84.582 U4.32
NetC7_1: C7.1 L2.2 U6.6 | length 7.2
  Top Layer w0.152: C7.1 L2.2 L2.2
  Top Layer w0.254: L2.2 U6.6
NetC7_2: C7.2 U6.1 | length 2.4
  Top Layer w0.152: C7.2 109.142,112.444 109.667,112.969 U6.1
NetC12_2: C12.2 L1.2 U5.2 | length 8.2
  Top Layer w0.152: L1.2@97.129,117.098 97.13,117.097 L1.2
  Top Layer w0.3: U5.2 L1.2@97.13,117.097 ; L1.2@97.129,117.098 C12.2
NetC15_2: C15.2 D3.A D5.K F1.2 | length 13.4
  Top Layer w0.254: F1.2 66.04,120.142 66.548,119.634 D5.K D3.A C15.2@70.028,121.363
NetD1_A: D1.A R3.1 | length 2.4
  Top Layer w0.152: R3.1 62.15,86.741 D1.A
NetD2_A: D2.A R4.1 | length 2
  Top Layer w0.152: D2.A 59.662,83.058 R4.1
NetD4_K: D4.K R9.2 | length 4
  Top Layer w0.152: R9.2 110.363,125.095 110.77,124.688 D4.K
NetD6_K: D6.K R11.2 | length 3.1
  Top Layer w0.152: D6.K R11.2
NetD7_K: D7.K R13.2 | length 1.9
  Top Layer w0.152: D7.K R13.2
"NetHeader 1_U1_Push Button_1": "Header 1_U1_Push Button.1" "R12_U1_Push Button.2" U4.15 | length 45.7
  Top Layer w0.152: U4.15 74.855,85.082 76.355,83.582 114.246,83.582 114.427,83.401 114.427,82.423 114.453,82.397 114.453,78.916
"NetHeader 1_U2_Push Button_1": "Header 1_U2_Push Button.1" "R12_U2_Push Button.2" U4.16 | length 49.3
  Top Layer w0.152: U4.16 74.857,85.582 76.502,83.937 117.193,83.937 117.729,83.401 117.729,82.423 117.755,82.397 117.755,78.916
"NetHeader 1_U3_Push Button_1": "Header 1_U3_Push Button.1" "R12_U3_Push Button.2" U4.30 | length 44.8
  Top Layer w0.152: 28.321,79.883 28.321,82.55 ; v1(66.421,85.725) 66.529,85.725 66.672,85.582 U4.30
  Bottom Layer w0.152: 28.321,82.55 28.321,83.731 28.654,84.064 48.405,84.064 49.167,84.826 56.632,84.826 57.531,85.725 v1(66.421,85.725)
"NetHeader 1_U4_Push Button_1": "Header 1_U4_Push Button.1" "R12_U4_Push Button.2" U4.31 | length 40.9
  Top Layer w0.152: 32.004,79.756 32.004,82.423 ; 32.004,82.55 32.131,82.423 ; v1(66.421,84.921) 66.529,84.921 66.69,85.082 U4.31
  Bottom Layer w0.152: 32.004,82.55 32.004,83.62 32.093,83.709 48.553,83.709 49.182,84.338 57.287,84.338 57.87,84.921 v1(66.421,84.921)
NetJ1_3: J1.3 U4.14 | length 29.1
  Top Layer w0.152: J1.3 60.642,74.74 62.23,73.152 72.898,73.152 75.946,76.2 75.946,83.439 74.803,84.582 U4.14
NetJ1_4: J1.4 U4.12 | length 24.9
  Top Layer w0.152: J1.4 62.642,74.264 63.119,73.787 72.644,73.787 75.311,76.454 75.311,83.17 74.899,83.582 U4.12
NetJ1_5: J1.5 U4.11 | length 20.2
  Top Layer w0.152: J1.5 J1.5 64.643,74.727 64.871,74.499 72.34,74.499 74.648,76.807 74.648,82.983 74.549,83.082 U4.11
NetJ1_6: J1.6 U4.9 | length 12.6
  Top Layer w0.152: J1.6 66.642,78.834 v1(67.056,79.248) ; v1(71.755,77.724) 73.12,79.089 U4.9
  Bottom Layer w0.152: v1(67.056,79.248) 68.58,77.724 v1(71.755,77.724)
NetJ1_7: J1.7 U4.8 | length 8.6
  Top Layer w0.152: J1.7 68.642,78.778 68.731,78.867 72.136,78.867 72.62,79.351 U4.8
NetJ1_8: J1.8 U4.10 | length 7.9
  Top Layer w0.152: J1.8 72.009,76.835 73.87,78.696 U4.10
NetL3_1: L3.1 U7.1 | length 8.5
  Top Layer w0.254: U7.1 113.665,102.743 114.3,103.378 L3.1@114.3,105.664
NetR5_1: R5.1 U1.2 U4.23 | length 8.6
  Top Layer w0.152: R5.1 70.13,89.561 v1(70.739,90.17) U1.2 ; U4.23 71.12,88.646 v1(71.755,89.281)
  Bottom Layer w0.152: v1(70.739,90.17) 70.803,90.17 71.692,89.281 v1(71.755,89.281)
NetR6_1: R6.1 U1.3 U4.24 | length 8.6
  Top Layer w0.152: U4.24 70.62,89.162 71.755,90.297 ; U1.3 72.009,90.551 71.755,90.297 ; R6.1 72.592,89.46 71.755,90.297
NetR8_2: R8.2 U4.35 | length 5.8
  Top Layer w0.152: R8.2 64.389,81.788 66.04,83.439 67.056,83.439 67.413,83.082 U4.35
NRST: P1.1 R7.1 U4.4 | length 30.9
  Top Layer w0.152: P1.1 47.371,82.296 v1(47.688,82.614) 48.006,82.931 R7.1 ; v1(64.008,80.137) 67.437,80.137 68.326,81.026 70.485,81.026 70.612,81.153 70.612,81.824 U4.4
  Bottom Layer w0.152: v1(47.688,82.614) 51.689,78.613 62.484,78.613 v1(64.008,80.137)
SWCLK: P1.2 U4.28 | length 31.3
  Top Layer w0.152: P1.2 41.275,81.242 41.364,81.153 48.206,81.153 54.618,87.565 63.005,87.565 63.996,86.573 68.361,86.573 U4.28
SWDIO: P1.4 U4.25 | length 42
  Top Layer w0.152: v1(37.084,85.217) 38.735,83.566 P1.4 ; v1(69.469,88.9) 70.12,88.249 U4.25
  Bottom Layer w0.152: v1(37.084,85.217) 37.084,87.503 38.227,88.646 65.532,88.646 65.786,88.9 v1(69.469,88.9)
UART_RX: P2.2 U4.22 | length 21.9
  Top Layer w0.152: U4.22 71.62,88.257 71.829,88.466 89.588,88.466 90.424,87.63 P2.2
UART_TX: P2.3 U4.21 | length 18.3
  Top Layer w0.152: U4.21 72.12,87.995 72.235,88.11 87.15,88.11 87.884,87.376 P2.3
VBAT_D: C16.2 C17.2 D3.K U5.1 | length 19.1
  Top Layer w0.254: D3.K 77.453,117.983 C17.2 77.487,117.983 79.756,117.983 80.264,118.491 80.264,121.158 80.723,121.617 C16.2 81.788,117.729 82.42,117.097 U5.1
VBAT_F: C13.2 C14.2 C18.2 C19.2 D4.A L1.1 U6.4 U6.5 | length 21.8
  Top Layer w0.3: L1.1 100.733,119.91 101.727,120.904 C14.2 109.474,120.904 ; U6.5 110.617,119.507 ; 111.506,118.872 111.567,118.811 U6.4 ; C18.2 114.173,118.491 114.3,118.618 ; 115.951,118.872 116.332,118.491 C19.2
pads on no net: J1.9 J1.10 P1.3 P1.9 P1.10 P4.5 P4.PEG U4.2 U4.3 U4.7 U4.13 U4.17 U4.20 U4.29 U4.33 U4.37

## Polygon pours and split planes (outlines as drawn)
3V3 on Int2 (PWR) "3V3_L03_P003" (solid, pour order 3): 25.654,93.218 25.654,69.215 25.781,69.088 25.908,69.215 120.65,69.215 120.65,93.218
5V on Int2 (PWR) "5V_TOP_1" (solid, pour order 10): 25.781,125.095 cw(c27.051,125.095) 27.051,126.365 119.38,126.365 cw(c119.38,125.095) 120.65,125.095 120.65,99.441 25.781,99.441
0V_(ISO) on Int1 (GND) "0V_(ISO)_L02_P004" (solid, pour order 4): 25.781,93.345 25.781,69.088 120.65,69.088 120.904,69.342 120.65,69.596 120.65,93.218
0V on Int1 (GND) "5V_TOP_1" (solid, pour order 9): 25.781,125.095 cw(c27.051,125.095) 27.051,126.365 119.38,126.365 cw(c119.38,125.095) 120.65,125.095 120.65,99.441 25.781,99.441
0V_(ISO) on Bottom Layer "0V_(ISO)_L04_P005" (solid, pour order 5): 25.654,93.218 25.654,69.342 26.035,68.961 26.162,69.088 120.65,69.088 120.65,93.091 120.523,93.218
0V on Bottom Layer "5V_TOP_1" (solid, pour order 11): 25.781,125.095 cw(c27.051,125.095) 27.051,126.365 119.38,126.365 cw(c119.38,125.095) 120.65,125.095 120.65,99.441 25.781,99.441
0V_(ISO) on Top Layer "0V_(ISO)_L01_P000" (solid, pour order 0): 25.781,93.091 120.65,93.091 120.65,69.088 25.781,69.088
0V on Top Layer "5V_TOP_1" (solid, pour order 8): 25.781,125.095 cw(c27.051,125.095) 27.051,126.365 119.38,126.365 cw(c119.38,125.095) 120.65,125.095 120.65,99.441 25.781,99.441
VBAT_F on Top Layer "5V_TOP_1" (solid, pour order 7): 108.331,121.539 108.331,118.999 109.855,117.475 116.713,117.475 116.967,117.729 116.967,121.666 116.713,121.92 108.712,121.92
5V on Top Layer "5V_TOP_1" (solid, pour order 6): 103.378,110.363 105.156,110.363 105.283,110.49 105.283,118.491 105.156,118.618 103.505,118.618 103.378,118.491

## Silkscreen, mask and mechanical layers (free items; w line width, h text height)
Top Overlay:
  lines w0.254: 25.654,93.218 120.65,93.218 ; 25.781,99.441 120.65,99.441

## Dimensions
150.495,133.096 to 163.209,133.934 on Drill Drawing
38.848,141.91 to 108.825,144.196 on Drill Drawing
26.036,132.461 to 121.286,131.064 on Drill Drawing
3.683,103.363 to 2.921,70.216 on Drill Drawing
24.384,109.347 to 24.384,103.251 on Drill Drawing
27.051,69.088 to 52.959,53.594 on Drill Drawing
24.638,69.088 to 25.146,127 on Drill Drawing

## Text inside footprints (layer, text, board x,y; h text height)
C17: Top Overlay "+" at 72.263,124.714 h1.52 r270